# EAGLE board untitled_unrouted (EAGLE 8.2.2)

Size 69.38 x 67.19 mm. Coordinates in mm from the lower left corner, seen from the top.
Outline: 0.01,0.04 69.38,0 69.36,67.19 0,67.19 0.01,0.04
Copper layers (1*16): Top 0.035mm / dielectric 1.5mm / Bottom 0.035mm
Design rules "default *": minimum track width 7mil, minimum drill 0.3mm, track to track 7mil, track to pad 7mil, pad to pad 7mil, via to via 7mil, smd to smd 7mil, copper to edge 0.4mm, drill to drill 8mil, minimum pad ring 10mil, minimum via ring 8mil, stop-mask expansion 4mil, vias tented up to drill 0mil, thermal gap 10mil
Net classes: 1 vcc: width 0.6 mm

## Footprints (pad centres in the part's own frame; a part is rotated, then mirrored left to right if it is on the bottom)
E2,5-5 = drill 0.813 pad 1.6: + -1.27,0 | drill 0.813 pad 1.6 octagon: - 1.27,0
C2.5-2 = drill 0.813 pad 1.6 octagon: 1 -1.27,0; 2 1.27,0
1,6/0,8 = drill 0.813 pad 1.6 octagon: 1 0,0
DIL40 = drill 0.813 long: 1 -24.13,-7.62; 2 -21.59,-7.62; 3 -19.05,-7.62; 4 -16.51,-7.62; 5 -13.97,-7.62; 6 -11.43,-7.62; 7 -8.89,-7.62; 8 -6.35,-7.62; 9 -3.81,-7.62; 10 -1.27,-7.62; 11 1.27,-7.62; 12 3.81,-7.62; 13 6.35,-7.62; 14 8.89,-7.62; 15 11.43,-7.62; 16 13.97,-7.62; 17 16.51,-7.62; 18 19.05,-7.62; 19 21.59,-7.62; 20 24.13,-7.62; 21 24.13,7.62; 22 21.59,7.62; 23 19.05,7.62; 24 16.51,7.62; 25 13.97,7.62; 26 11.43,7.62; 27 8.89,7.62; 28 6.35,7.62; 29 3.81,7.62; 30 1.27,7.62; 31 -1.27,7.62; 32 -3.81,7.62; 33 -6.35,7.62; 34 -8.89,7.62; 35 -11.43,7.62; 36 -13.97,7.62; 37 -16.51,7.62; 38 -19.05,7.62; 39 -21.59,7.62; 40 -24.13,7.62
SO16 = smd 0.66 x 2.032: 1 -4.445,-3.073; 2 -3.175,-3.073; 3 -1.905,-3.073; 4 -0.635,-3.073; 5 0.635,-3.073; 6 1.905,-3.073; 7 3.175,-3.073; 8 4.445,-3.073; 9 4.445,3.073; 10 3.175,3.073; 11 1.905,3.073; 12 0.635,3.073; 13 -0.635,3.073; 14 -1.905,3.073; 15 -3.175,3.073; 16 -4.445,3.073
SO14 = smd 0.66 x 2.032: 1 -3.81,-3.073; 2 -2.54,-3.073; 3 -1.27,-3.073; 4 0,-3.073; 5 1.27,-3.073; 6 2.54,-3.073; 7 3.81,-3.073; 8 3.81,3.073; 9 2.54,3.073; 10 1.27,3.073; 11 0,3.073; 12 -1.27,3.073; 13 -2.54,3.073; 14 -3.81,3.073
SOIC127P1407X299-32N = smd 1.803 x 0.457: 1 -6.655,9.525; 2 -6.655,8.255; 3 -6.655,6.985; 4 -6.655,5.715; 5 -6.655,4.445; 6 -6.655,3.175; 7 -6.655,1.905; 8 -6.655,0.635; 9 -6.655,-0.635; 10 -6.655,-1.905; 11 -6.655,-3.175; 12 -6.655,-4.445; 13 -6.655,-5.715; 14 -6.655,-6.985; 15 -6.655,-8.255; 16 -6.655,-9.525; 17 6.655,-9.525; 18 6.655,-8.255; 19 6.655,-6.985; 20 6.655,-5.715; 21 6.655,-4.445; 22 6.655,-3.175; 23 6.655,-1.905; 24 6.655,-0.635; 25 6.655,0.635; 26 6.655,1.905; 27 6.655,3.175; 28 6.655,4.445; 29 6.655,5.715; 30 6.655,6.985; 31 6.655,8.255; 32 6.655,9.525
SOIC127P1032X265-20N = smd 1.981 x 0.559: 1 -4.699,5.715; 2 -4.699,4.445; 3 -4.699,3.175; 4 -4.699,1.905; 5 -4.699,0.635; 6 -4.699,-0.635; 7 -4.699,-1.905; 8 -4.699,-3.175; 9 -4.699,-4.445; 10 -4.699,-5.715; 11 4.699,-5.715; 12 4.699,-4.445; 13 4.699,-3.175; 14 4.699,-1.905; 15 4.699,-0.635; 16 4.699,0.635; 17 4.699,1.905; 18 4.699,3.175; 19 4.699,4.445; 20 4.699,5.715

## Placement (x,y rotation side)
C1  100m  [E2,5-5]  53.58,50.02 90 top
C2  0.01u  [C2.5-2]  53.08,60.79 270 top
GND  GND  [1,6/0,8]  66.88,22.88 0 top
IC1  Z80  [DIL40]  25.45,55.12 0 top
IC2  74HC139D  [SO16]  26.81,56.41 180 bottom
IC3  74HC670D  [SO16]  62.63,51.26 180 bottom
IC4  74HC670D  [SO16]  62.6,61.78 180 bottom
IC5  74HC138D  [SO16]  62.59,40.28 180 bottom
IC6  74HC30D  [SO14]  10.15,56.41 180 bottom
IC7  74HC257D  [SO16]  43.8,56.42 180 bottom
IC8  DIP40  [DIL40]  25.46,57.62 0 top
SLTSL  SLTSL  [1,6/0,8]  66.86,45.79 0 top
U1  AS6C4008-55SIN  [SOIC127P1407X299-32N]  60.17,11.34 180 top
U2  AS6C4008-55SIN  [SOIC127P1407X299-32N]  43.15,11.32 180 top
U3  AS6C4008-55SIN  [SOIC127P1407X299-32N]  26.18,11.33 180 top
U4  AS6C4008-55SIN  [SOIC127P1407X299-32N]  9.14,11.28 180 top
U5  AS6C4008-55SIN  [SOIC127P1407X299-32N]  9.15,34.35 180 top
U7  AS6C4008-55SIN  [SOIC127P1407X299-32N]  26.15,34.31 180 top
U8  AS6C4008-55SIN  [SOIC127P1407X299-32N]  43.13,34.32 180 top
U9  AS6C4008-55SIN  [SOIC127P1407X299-32N]  60.13,34.3 180 top
U10  MM74HC373WM  [SOIC127P1032X265-20N]  61.81,59.47 270 top
VCC  VCC  [1,6/0,8]  2.43,22.79 0 top

## Library data of the parts
C1 = resistor
C2 = capacitor-wima
GND SLTSL VCC = wirepad
IC1 = zilog
IC2-IC7 = 74xx-eu
IC8 = ic-package
U1-U5 U7-U9 = Alliance_Memory_By_element14_Batch_1; MPN: AS6C4008-55SIN; OC_FARNELL: 1562901; OC_NEWARK: 94M6218; PACKAGE: SO-32; SUPPLIER: ALLIANCE MEMORY
U10 = Fairchild_By_element14_Batch_1; MPN: MM74HC373WM; OC_FARNELL: 1013976; OC_NEWARK: 78K6072; PACKAGE: SOIC-20; SUPPLIER: Fairchild

## Nets
A0: IC1.30 IC3.14 IC4.14 IC7.2 IC8.30 U1.12 U2.12 U3.12 U4.12 U5.12 U7.12 U8.12 U9.12
A1: IC1.31 IC3.13 IC4.13 IC7.5 IC8.31 U1.11 U2.11 U3.11 U4.11 U5.11 U7.11 U8.11 U9.11
A2: IC1.32 IC6.1 IC8.32 U1.10 U2.10 U3.10 U4.10 U5.10 U7.10 U8.10 U9.10
A3: IC1.33 IC6.2 IC8.33 U1.9 U2.9 U3.9 U4.9 U5.9 U7.9 U8.9 U9.9
A4: IC1.34 IC6.3 IC8.34 U1.8 U2.8 U3.8 U4.8 U5.8 U7.8 U8.8 U9.8
A5: IC1.35 IC6.4 IC8.35 U1.7 U2.7 U3.7 U4.7 U5.7 U7.7 U8.7 U9.7
A6: IC1.36 IC6.5 IC8.36 U1.6 U2.6 U3.6 U4.6 U5.6 U7.6 U8.6 U9.6
A7: IC1.37 IC6.6 IC8.37 U1.5 U2.5 U3.5 U4.5 U5.5 U7.5 U8.5 U9.5
A8: IC1.38 IC8.38 U1.27 U2.27 U3.27 U4.27 U5.27 U7.27 U8.27 U9.27
A9: IC1.39 IC8.39 U1.26 U2.26 U3.26 U4.26 U5.26 U7.26 U8.26 U9.26
A10: IC1.40 IC8.40 U1.23 U2.23 U3.23 U4.23 U5.23 U7.23 U8.23 U9.23
A11: IC1.1 IC8.1 U1.25 U2.25 U3.25 U4.25 U5.25 U7.25 U8.25 U9.25
A12: IC1.2 IC8.2 U1.4 U2.4 U3.4 U4.4 U5.4 U7.4 U8.4 U9.4
A13: IC1.3 IC8.3 U1.28 U2.28 U3.28 U4.28 U5.28 U7.28 U8.28 U9.28
A14: IC1.4 IC7.3 IC8.4
A15: IC1.5 IC7.6 IC8.5
BUSAK: IC1.23 IC8.23
BUSRQ: IC1.25 IC8.25
CLK: IC1.6 IC8.6
D0: IC1.14 IC4.15 IC8.14 U1.13 U2.13 U3.13 U4.13 U5.13 U7.13 U8.13 U9.13 U10.2
D1: IC1.15 IC4.1 IC8.15 U1.14 U2.14 U3.14 U4.14 U5.14 U7.14 U8.14 U9.14 U10.5
D2: IC1.12 IC4.2 IC8.12 U1.15 U2.15 U3.15 U4.15 U5.15 U7.15 U8.15 U9.15 U10.6
D3: IC1.8 IC4.3 IC8.8 U1.17 U2.17 U3.17 U4.17 U5.17 U7.17 U8.17 U9.17 U10.9
D4: IC1.7 IC3.15 IC8.7 U1.18 U2.18 U3.18 U4.18 U5.18 U7.18 U8.18 U9.18 U10.12
D5: IC1.9 IC3.1 IC8.9 U1.19 U2.19 U3.19 U4.19 U5.19 U7.19 U8.19 U9.19 U10.15
D6: IC1.10 IC3.2 IC8.10 U1.20 U2.20 U3.20 U4.20 U5.20 U7.20 U8.20 U9.20 U10.16
D7: IC1.13 IC3.3 IC8.13 U1.21 U2.21 U3.21 U4.21 U5.21 U7.21 U8.21 U9.21 U10.19
GND [vcc]: C1.- C2.2 GND.1 IC1.29 IC2.8 IC3.8 IC3.11 IC4.8 IC4.11 IC5.8 IC6.7 IC7.8 IC7.10 IC7.11 IC7.13 IC7.14 IC7.15 IC8.29 U1.16 U2.16 U3.16 U4.16 U5.16 U7.16 U8.16 U9.16 U10.10
HALT: IC1.18 IC8.18
INT: IC1.16 IC8.16
IORQ: IC1.20 IC2.3 IC2.13 IC8.20
M1: IC1.27 IC8.27
MA14: IC4.10 U1.3 U2.3 U3.3 U4.3 U5.3 U7.3 U8.3 U9.3 U10.3
MA15: IC4.9 U1.31 U2.31 U3.31 U4.31 U5.31 U7.31 U8.31 U9.31 U10.4
MA16: IC4.7 U1.2 U2.2 U3.2 U4.2 U5.2 U7.2 U8.2 U9.2 U10.7
MA17: IC4.6 U1.30 U2.30 U3.30 U4.30 U5.30 U7.30 U8.30 U9.30 U10.8
MA18: IC3.10 U1.1 U2.1 U3.1 U4.1 U5.1 U7.1 U8.1 U9.1 U10.13
MA19: IC3.9 IC5.1 U10.14
MA20: IC3.7 IC5.2 U10.17
MA21: IC3.6 IC5.3 U10.18
MREQ: IC1.19 IC8.19
N$1: IC2.12 IC7.1 U10.1
N$2: IC5.13 U1.22
N$3: IC5.12 U2.22
N$4: IC3.5 IC4.5 IC7.4
N$5: IC5.15 U4.22
N$6: IC5.14 U5.22
N$7: IC3.4 IC4.4 IC7.7
N$8: IC5.11 U9.22
N$9: IC2.1 IC2.15 IC6.8
N$10: IC5.10 U8.22
N$11: IC5.9 U7.22
N$12: IC2.4 IC3.12 IC4.12
N$13: IC5.4 IC5.5 SLTSL.1
N$14: IC5.7 U3.22
NMI: IC1.17 IC8.17
RD: IC1.21 IC2.14 IC8.21 U1.24 U2.24 U3.24 U4.24 U5.24 U7.24 U8.24 U9.24
RESET: IC1.26 IC8.26
RFSH: IC1.28 IC8.28
VCC [vcc]: C1.+ C2.1 IC1.11 IC2.16 IC3.16 IC4.16 IC5.6 IC5.16 IC6.11 IC6.12 IC6.14 IC7.16 IC8.11 U1.32 U2.32 U3.32 U4.32 U5.32 U7.32 U8.32 U9.32 U10.11 U10.20 VCC.1
WAIT: IC1.24 IC8.24
WR: IC1.22 IC2.2 IC8.22 U1.29 U2.29 U3.29 U4.29 U5.29 U7.29 U8.29 U9.29

## Tracks (layer width: path | path; a pad name or v marks a point on that pad's centre or on a via)
A0  (12 unrouted)
A1  (12 unrouted)
A2  (10 unrouted)
A3  (10 unrouted)
A4  (10 unrouted)
A5  (10 unrouted)
A6  (10 unrouted)
A7  (10 unrouted)
A8  (9 unrouted)
A9  (9 unrouted)
A10  (9 unrouted)
A11  (9 unrouted)
A12  (9 unrouted)
A13  (9 unrouted)
A14  (2 unrouted)
A15  (2 unrouted)
BUSAK  (1 unrouted)
BUSRQ  (1 unrouted)
CLK  (1 unrouted)
D0  (11 unrouted)
D1  (11 unrouted)
D2  (11 unrouted)
D3  (11 unrouted)
D4  (11 unrouted)
D5  (11 unrouted)
D6  (11 unrouted)
D7  (11 unrouted)
GND  (26 unrouted)
HALT  (1 unrouted)
INT  (1 unrouted)
IORQ  (3 unrouted)
M1  (1 unrouted)
MA14  (9 unrouted)
MA15  (9 unrouted)
MA16  (9 unrouted)
MA17  (9 unrouted)
MA18  (9 unrouted)
MA19  (2 unrouted)
MA20  (2 unrouted)
MA21  (2 unrouted)
MREQ  (1 unrouted)
N$1  (2 unrouted)
N$2  (1 unrouted)
N$3  (1 unrouted)
N$4  (2 unrouted)
N$5  (1 unrouted)
N$6  (1 unrouted)
N$7  (2 unrouted)
N$8  (1 unrouted)
N$9  (2 unrouted)
N$10  (1 unrouted)
N$11  (1 unrouted)
N$12  (2 unrouted)
N$13  (2 unrouted)
N$14  (1 unrouted)
NMI  (1 unrouted)
RD  (10 unrouted)
RESET  (1 unrouted)
RFSH  (1 unrouted)
VCC  (23 unrouted)
WAIT  (1 unrouted)
WR  (10 unrouted)